# Altium PCB Input Cover Breakout.PcbDoc
Units mil, origin at the board's own origin, x right, y up, seen from the top; angles counter-clockwise.
Board outline 1640 x 1900 mil, 2 copper layers (Top Layer, Bottom Layer); 6 components, 42 nets, 105 pads, 25 vias.
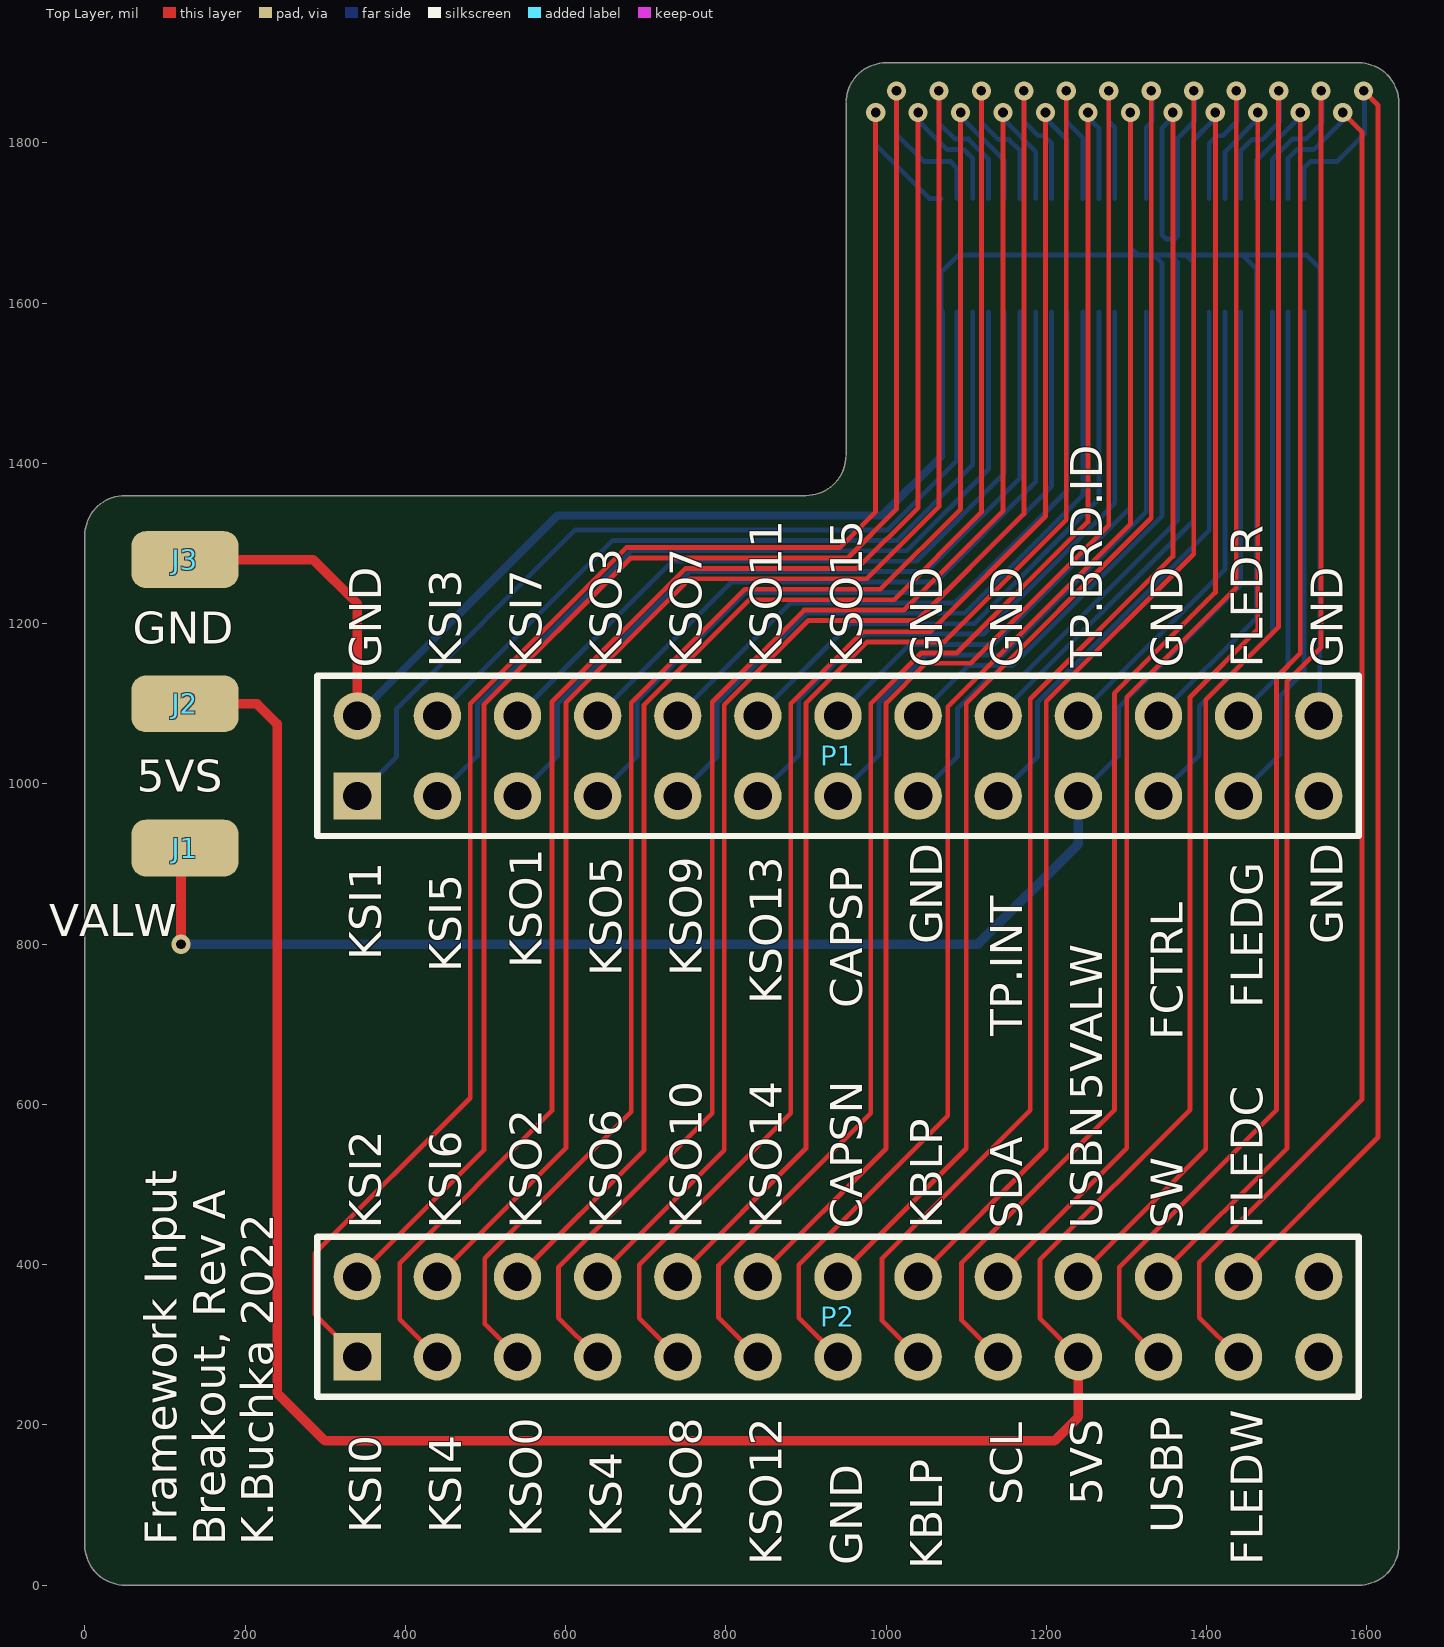
[diagram p0: Top Layer view]
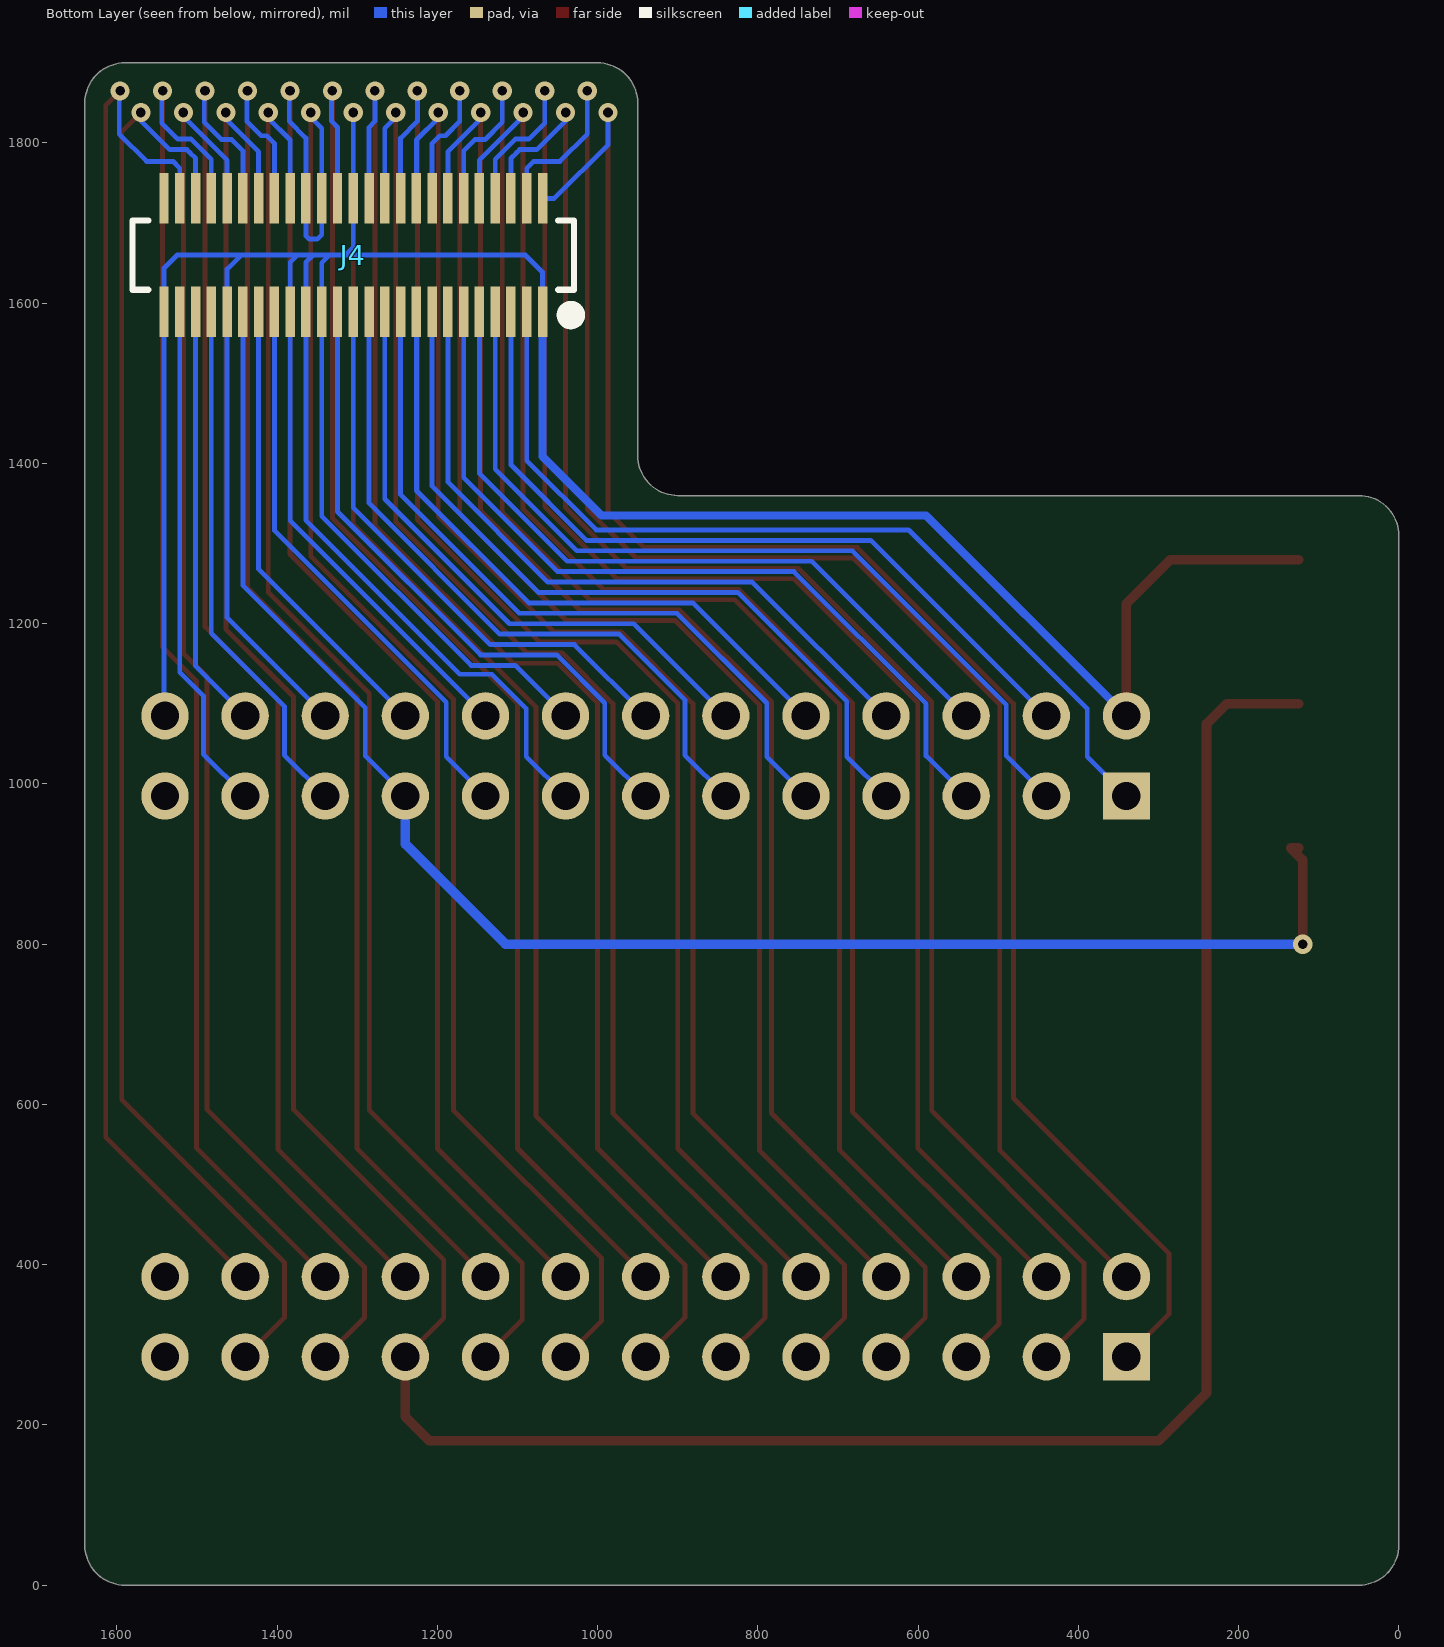
[diagram p1: Bottom Layer view, seen from below]

## Layer stack, top to bottom
Top Solder: solder mask 0.4, Solder Resist, Dk 3.5
Top Layer: signal copper 1.4
Dielectric 1: dielectric 12.6, FR-4, Dk 4.8
Bottom Layer: signal copper 1.4
Bottom Solder: solder mask 0.4, Solder Resist, Dk 3.5

## Board outline
0,50 0,1310 cw(c50,1310) 50,1360 900,1360 ccw(c900,1410) 950,1410 950,1850 cw(c1000,1850) 1000,1900 1590,1900 cw(c1590,1850) 1640,1850 1640,50 cw(c1590,50) 1590,0 50,0 cw(c50,50)

## Design rules (kind name [scope] priority, off if disabled: settings)
Clearance [All] p1: gap=7 ignorepadtopadclearanceinfootprint=FALSE
PolygonConnect [All] p1: connectstyle=Relief reliefconductorwidth=10 reliefentries=4 polygonreliefangle="90 Angle" airgapwidth=10
RoomDefinition "Input Cover Breakout" [InComponentClass('Input Cover Breakout')] p1: confinementstyle=ConfineIn formatcopy=TRUE lockcomponents=FALSE outline -1460,-1815 6820,-1815 6820,3840 -1460,3840
RoutingVias [All] p1: holewidth=12 width=24 viastyle="Through Hole" minholewidth=12 minwidth=24 maxholewidth=28 maxwidth=50
SolderMaskExpansion [All] p1: expansion=4
Width [All] p1: maxlimit=30 minlimit=6 preferedwidth=8 minimp=50.000000 maximp=50.000000 favimp=50.000000
30 further rules are at their usual default settings.

## Components (designator, comment, footprint, x,y, rotation, side; value= is the part's Value field where it differs from the comment)
J1 "RCS-0C" RCS-0C 125,920 r270 top
J2 "RCS-0C" RCS-0C 125,1100 r270 top
J3 "RCS-0C" RCS-0C 125,1280 r270 top
J4 "10156001-051100LF" 10156001-051100LF 1305,1660 r0 bottom
P1 "Header 13X2" HDR2X13 340,985 r0 top
P2 "Header 13X2" HDR2X13 340,285 r0 top

## Footprints (in the part's own frame and the unit in brackets; to place one, negate y for a bottom-side part, rotate by r counter-clockwise, add the part's x,y. Pads: shape width x height; smd on the part's side, far side on the other; paste and mask are expansions set on the pad)
10156001-051100LF [mm]
  rect 0.3x1.6 smd: 1(-6,1.8) 2(-6,-1.8) 3(-5.5,1.8) 4(-5.5,-1.8) 5(-5,1.8) 6(-5,-1.8) 7(-4.5,1.8) 8(-4.5,-1.8) 9(-4,1.8) 10(-4,-1.8) 11(-3.5,1.8) 12(-3.5,-1.8) 13(-3,1.8) 14(-3,-1.8) 15(-2.5,1.8) 16(-2.5,-1.8) 17(-2,1.8) 18(-2,-1.8) 19(-1.5,1.8) 20(-1.5,-1.8) 21(-1,1.8) 22(-1,-1.8) 23(-0.5,1.8) 24(-0.5,-1.8) 25(0,1.8) 26(0,-1.8) 27(0.5,1.8) 28(0.5,-1.8) 29(1,1.8) 30(1,-1.8) 31(1.5,1.8) 32(1.5,-1.8) 33(2,1.8) 34(2,-1.8) 35(2.5,1.8) 36(2.5,-1.8) 37(3,1.8) 38(3,-1.8) 39(3.5,1.8) 40(3.5,-1.8) 41(4,1.8) 42(4,-1.8) 43(4.5,1.8) 44(4.5,-1.8) 45(5,1.8) 46(5,-1.8) 47(5.5,1.8) 48(5.5,-1.8) 49(6,1.8) 50(6,-1.8)
  silkscreen extent -7.1,-1.1 7,2.1
HDR2X13 [mm] "Connector; Header; 13x2 Position"
  rect 1.5x1.5 hole 0.9: 1(0,0)
  round 1.5 hole 0.9: 2(0,2.54) 3(2.54,0) 4(2.54,2.54) 5(5.08,0) 6(5.08,2.54) 7(7.62,0) 8(7.62,2.54) 9(10.16,0) 10(10.16,2.54) 11(12.7,0) 12(12.7,2.54) 13(15.24,0) 14(15.24,2.54) 15(17.78,0) 16(17.78,2.54) 17(20.32,0) 18(20.32,2.54) 19(22.86,0) 20(22.86,2.54) 21(25.4,0) 22(25.4,2.54) 23(27.94,0) 24(27.94,2.54) 25(30.48,0) 26(30.48,2.54)
  silkscreen extent -1.27,-1.27 31.75,3.81
RCS-0C [mm] "1206 Test Point"
  rrect50% 1.8x3.4 smd: 1(0,0)

## Part data
P1 P2: "Header, 13-Pin, Dual row", LatestRevisionDate=17-Jul-2002, LatestRevisionNote="Re-released for DXP Platform.", Publisher="Altium Limited"

## Via types
v1: diameter 24, hole 12, Top Layer to Bottom Layer, 25 vias

## Nets (pads, with @x,y where several pads share a name; then routed paths per layer and width w, separated by ;. In a path a pad name is that pad's centre, name@x,y a point inside that pad or via, vN(x,y) a via of type N, cw(c..) or ccw(c..) an arc to the next point about the centre after c; other vN are vias at no path point)
5VALW: J1.1 J4.39 P1.19 | length 2056.1
  Top Layer w12: v1(120,800) 120,905 135,920 J1.1
  Bottom Layer w6: P1.19 1290,1035 1290,1095 1442.8,1247.8 J4.39
  Bottom Layer w12: v1(120,800) 1115,800 1240,925 P1.19
5VS: J2.1 J4.38 P2.19 | length 3872.3
  Top Layer w6: P2.19 1192,333 1192,406 1379.53,593.53 1379.53,1108.53 1464,1193 v1@1464,1836
  Top Layer w12: J2.1 215,1100 240,1075 240,240 300,180 1210,180 1240,210 P2.19
  Bottom Layer w6: J4.38 1423.11,1789.11 v1@1464,1830
  other v1: 1464,1838
CAPS_N: J4.28 P2.14 | length 1768.1
  Top Layer w6: P2.14 1100,545 1100,1100.9 1331,1331.9 v1@1331,1860
  Bottom Layer w6: J4.28 1324.68,1819.68 1332,1827 v1@1332,1859
  other v1: 1331,1865
CAPS_P: J4.27 P1.13 | length 819.1
  Bottom Layer w6: P1.13 991,1036 991,1101 1051,1161 1146,1161 1324.68,1339.68 J4.27
FPR_CTRL: J4.43 P1.21 | length 663
  Bottom Layer w6: P1.21 1391,1036 1391,1097 1482.17,1188.17 J4.43
FPR_LED_COM: J4.48 P2.24 | length 1733.3
  Top Layer w6: P2.24 1614,559 1614,1847 v1(1596,1865)
  Bottom Layer w6: J4.48 1521.54,1768.54 1530,1777 1563,1777 1597,1811 v1@1597,1854
FPR_LED_G: J4.47 P1.23 | length 637.9
  Bottom Layer w6: P1.23 1492,1037 1492,1110 1521.54,1139.54 J4.47
FPR_LED_R: J4.45 P1.24 | length 529.8
  Bottom Layer w6: P1.24 1501.85,1146.85 J4.45
FPR_LED_W: J4.46 P2.23 | length 1805.4
  Top Layer w6: P2.23 1391,334 1391,403 1594,606 1594,1814 v1(1570,1838)
  Bottom Layer w6: J4.46 1501.85,1780.85 1509,1788 1508.77,1788 1512.58,1791.81 1533.81,1791.81 v1@1570,1828
GND: J3.1 J4.1 J4.26 J4.29 J4.31 J4.33 J4.41 J4.49 P1.2 P1.15 P1.16 P1.18 P1.22 P1.26 P2.13 | length 7322.2
  Top Layer w6: P2.13 891,334 891,400 1077,586 1077,1096.29 1305,1324.29 v1@1305,1833
  Top Layer w12: J3.1 285,1280 340,1225 P1.2
  Bottom Layer w6: P1.15 1089,1034 1089,1094 1132,1137 1172,1137 1364.06,1329.06 J4.31 1364.06,1650.94 1355,1660 ; P1.16 1103,1148 1158,1148 1344.37,1334.37 J4.29 1344.37,1650.63 1335,1660 ; J4.1 1068.78,1638.78 1090,1660 1315,1660 ; P1.18 1383.74,1328.74 J4.33 1383.74,1651.26 1375,1660 ; v1@1305,1833 J4.26 1305,1670 1315,1660 ; P1.22 1462.48,1207.48 J4.41 1462.48,1642.52 1445,1660 ; P1.26 P1.26@1541.22,1086.22 ; P1.26@1541.22,1085 P1.26@1541.22,1086.22 ; 1315,1660 1335,1660 ; 1335,1660 1355,1660 ; 1355,1660 1375,1660 ; 1375,1660 1445,1660 ; 1445,1660 1525,1660 1541.22,1643.78 J4.49 P1.26@1541.22,1086.22
  Bottom Layer w10: P1.2 590,1335 995,1335 1068.78,1408.78 J4.1
  other v1: 1305,1838
KBL_P: J4.30 J4.32 P2.15 P2.16 | length 3694.8
  Top Layer w6: P2.15 995,330 995,408 1180,593 1180,1106 1358,1284 v1@1358,1834 ; P2.16 1200,545 1200,1103 1384,1287 v1@1384,1861
  Bottom Layer w6: v1@1358,1832 1344.37,1818.37 J4.30 1344.37,1685.63 1350,1680 1360,1680 1364.06,1684.06 J4.32 1364.06,1806.06 1385,1827 v1@1385,1858
  other v1: 1358,1838 1384,1865
KSI0: J4.2 P2.1 | length 2148.5
  Top Layer w6: P2.1 287,338 287,414 481,608 481,1100.29 675.71,1295 942,1295 987,1340 v1@987,1827
  Bottom Layer w6: v1@987,1827 987,1798 1054.13,1730.87 J4.2
  other v1: 987,1838
KSI1: J4.3 P1.1 | length 1142.6
  Bottom Layer w6: P1.1 389,1034 389,1094 612,1317 1002,1317 1088.46,1403.46 J4.3
KSI2: J4.4 P2.2 | length 2080.2
  Top Layer w6: P2.2 498,543 498,1098.9 681.1,1282 952,1282 1013,1343 v1@1013,1854
  Bottom Layer w6: v1@1013,1854 1013,1811 1047,1777 1080,1777 1088.46,1768.54 J4.4
  other v1: 1013,1865
KSI3: J4.5 P1.4 | length 988.8
  Bottom Layer w6: P1.4 659,1304 1014,1304 1108.15,1398.15 J4.5
KSI4: J4.6 P2.3 | length 2094.1
  Top Layer w6: P2.3 393,332 393,402 583,592 583,1102.29 749.71,1269 964,1269 1040,1345 v1@1040,1828
  Bottom Layer w6: v1@1040,1828 1076.19,1791.81 1097.42,1791.81 1101.23,1788 1101,1788 1108.15,1780.85 J4.6
  other v1: 1040,1838
KSI5: J4.7 P1.3 | length 1090.6
  Bottom Layer w6: P1.3 490,1035 490,1099 682,1291 1026,1291 1127.83,1392.83 J4.7
KSI6: J4.8 P2.4 | length 2018.2
  Top Layer w6: P2.4 600.47,545.47 600.47,1101.37 755.1,1256 976,1256 1066,1346 v1@1066,1855
  Bottom Layer w6: v1@1066,1855 1066,1824.89 1086.08,1804.81 1102.81,1804.81 1127.83,1779.78 J4.8
  other v1: 1066,1865
KSI7: J4.9 P1.6 | length 934.4
  Bottom Layer w6: P1.6 733,1278 1038,1278 1147.52,1387.52 J4.9
KSO0: J4.10 P2.5 | length 2029.3
  Top Layer w6: P2.5 499,326 499,408 682,591 682,1101.29 823.71,1243 993,1243 1093,1343 v1@1093,1829
  Bottom Layer w6: v1@1093,1829 1097,1829 1147.52,1778.48 J4.10
  other v1: 1093,1838
KSO1: J4.11 P1.5 | length 1036.7
  Bottom Layer w6: P1.5 590,1035 590,1100 755,1265 1050,1265 1167.2,1382.2 J4.11
KSO2: J4.12 P2.6 | length 1969.4
  Top Layer w6: P2.6 698,543 698,1098.9 829.1,1230 1010,1230 1119,1339 v1@1119,1856
  Bottom Layer w6: v1@1119,1856 1119,1825.89 1140.58,1804.31 1153.31,1804.31 1167.2,1790.41 J4.12
  other v1: 1119,1865
KSO3: J4.13 P1.8 | length 880
  Bottom Layer w6: P1.8 807,1252 1062,1252 1186.89,1376.89 J4.13
KSO4: J4.14 P2.7 | length 1984.1
  Top Layer w6: P2.7 591,334 591,397 783,589 783,1102.29 897.71,1217 1022,1217 1146,1341 v1@1146,1830
  Bottom Layer w6: v1@1146,1830 1186.89,1789.11 J4.14
  other v1: 1146,1838
KSO5: J4.15 P1.7 | length 984.7
  Bottom Layer w6: P1.7 689,1034 689,1103 825,1239 1074,1239 1206.57,1371.57 J4.15
KSO6: J4.16 P2.8 | length 1916.6
  Top Layer w6: P2.8 798,543 798,1098.9 903.1,1204 1039,1204 1172,1337 v1@1172,1857
  Bottom Layer w6: v1@1172,1857 1172,1826.89 1189.89,1809 1197,1809 1206.57,1799.43 J4.16
  other v1: 1172,1865
KSO7: J4.17 P1.10 | length 825.6
  Bottom Layer w6: P1.10 881,1226 1086,1226 1226.26,1366.26 J4.17
KSO8: J4.18 P2.9 | length 1936.7
  Top Layer w6: P2.9 692,333 692,400 881,589 881,1100.29 970.71,1190 1055,1190 1199,1334 v1@1199,1831
  Bottom Layer w6: v1@1199,1831 1226.26,1803.74 J4.18
  other v1: 1199,1838
KSO9: J4.19 P1.9 | length 929.1
  Bottom Layer w6: P1.9 789,1034 789,1101 901,1213 1098,1213 1245.94,1360.94 J4.19
KSO10: J4.20 P2.10 | length 1865.9
  Top Layer w6: P2.10 900,545 900,1100.9 976.1,1177 1072,1177 1225,1330 v1@1225,1858
  Bottom Layer w6: v1@1225,1858 1225,1827 1245.94,1806.06 J4.20
  other v1: 1225,1865
KSO11: J4.21 P1.12 | length 771.2
  Bottom Layer w6: P1.12 955,1200 1110,1200 1265.63,1355.63 J4.21
KSO12: J4.22 P2.11 | length 1891
  Top Layer w6: P2.11 791,334 791,399 981,589 981,1100.29 1044.24,1163.53 1088.53,1163.53 1252,1327 v1@1252,1832
  Bottom Layer w6: v1@1252,1832 1265.63,1818.37 J4.22
  other v1: 1252,1838
KSO13: J4.23 P1.11 | length 875.9
  Bottom Layer w6: P1.11 891,1036 891,1105 973,1187 1122,1187 1285.32,1350.32 J4.23
KSO14: J4.24 P2.12 | length 1819.3
  Top Layer w6: P2.12 1000,545 1000,1100.9 1049.63,1150.53 1105.53,1150.53 1278,1323 v1@1278,1859
  Bottom Layer w6: v1@1278,1859 1278,1827 1285.32,1819.68 J4.24
  other v1: 1278,1865
KSO15: J4.25 P1.14 | length 716.8
  Bottom Layer w6: P1.14 1029,1174 1134,1174 1305,1345 J4.25
SWITCH: J4.44 P2.22 | length 1722.6
  Top Layer w6: P2.22 1500.47,545.47 1500.47,1128.09 1543,1170.62 v1@1543,1864
  Bottom Layer w6: J4.44 1482.17,1779.78 1507.19,1804.81 1523.92,1804.81 1544,1824.89 v1@1544,1855
  other v1: 1543,1865
TP_BOARD_ID: J4.37 P1.20 | length 580
  Bottom Layer w6: P1.20 1423.11,1268.11 J4.37
TP_INT: J4.35 P1.17 | length 713.2
  Bottom Layer w6: P1.17 1189,1034 1189,1102 1403.43,1316.43 J4.35
TP_SCL: J4.34 P2.17 | length 1811.8
  Top Layer w6: P2.17 1094,331 1094,402 1285,593 1285,1113 1411,1239 v1@1411,1835
  Bottom Layer w6: J4.34 1383.74,1803.74 v1@1411,1831
  other v1: 1411,1838
TP_SDA: J4.36 P2.18 | length 1744.6
  Top Layer w6: P2.18 1300.47,545.47 1300.47,1108.47 1437,1245 v1@1437,1862
  Bottom Layer w6: J4.36 1403.43,1799.43 1413,1809 1420.11,1809 1438,1826.89 v1@1438,1857
  other v1: 1437,1865
USBN: J4.40 P2.20 | length 1734.1
  Top Layer w6: P2.20 1399,544 1399,1105 1490,1196 v1@1490,1863
  Bottom Layer w6: J4.40 1442.8,1790.41 1456.69,1804.31 1469.42,1804.31 1491,1825.89 v1@1491,1856
  other v1: 1490,1865
USBP: J4.42 P2.21 | length 1789
  Top Layer w6: P2.21 1291,334 1291,397 1487.47,593.47 1487.47,1133.47 1517,1163 v1@1517,1837
  Bottom Layer w6: J4.42 1462.48,1778.48 1513,1829 v1@1517,1829
  other v1: 1517,1838
pads on no net: J4.50 P1.25 P2.25 P2.26

## Silkscreen, mask and mechanical layers (free items; w line width, h text height)
Top Overlay:
  text "GND" at 60,1175 h40
  text "GND" at 370,1145 h40 r90
  text "KSI3" at 470,1145 h40 r90
  text "KSI7" at 570,1145 h40 r90
  text "KSO3" at 670,1145 h40 r90
  text "KSO7" at 770,1145 h40 r90
  text "KSO11" at 870,1145 h40 r90
  text "KSO15" at 970,1145 h40 r90
  text "GND" at 1070,1145 h40 r90
  text "GND" at 1170,1145 h40 r90
  text "TP.BRD.ID" at 1270,1145 h40 r90
  text "GND" at 1370,1145 h40 r90
  text "FLEDR" at 1470,1145 h40 r90
  text "GND" at 1570,1145 h40 r90
  text "5VS" at 65,990 h40
  text "5VALW" at -80,810 h40
  text "GND" at 1070,800 h40 r90
  text "GND" at 1570,800 h40 r90
  text "KSI1" at 370,780 h40 r90
  text "KSO1" at 570,770 h40 r90
  text "KSI5" at 470,765 h40 r90
  text "KSO5" at 670,760 h40 r90
  text "KSO9" at 770,760 h40 r90
  text "KSO13" at 870,725 h40 r90
  text "CAPSP" at 970,720 h40 r90
  text "FLEDG" at 1470,720 h40 r90
  text "TP.INT" at 1170,685 h40 r90
  text "FCTRL" at 1370,680 h40 r90
  text "5VALW" at 1270,605 h40 r90
  text "KSI2" at 370,445 h40 r90
  text "KSI6" at 470,445 h40 r90
  text "KSO2" at 570,445 h40 r90
  text "KSO6" at 670,445 h40 r90
  text "KSO10" at 770,445 h40 r90
  text "KSO14" at 870,445 h40 r90
  text "CAPSN" at 970,445 h40 r90
  text "KBLP" at 1070,445 h40 r90
  text "SDA" at 1170,445 h40 r90
  text "USBN" at 1270,445 h40 r90
  text "SW" at 1370,445 h40 r90
  text "FLEDC" at 1470,445 h40 r90
  text "SCL" at 1170,100 h40 r90
  text "5VS" at 1270,100 h40 r90
  text "KSI0" at 370,65 h40 r90
  text "KSI4" at 470,65 h40 r90
  text "USBP" at 1370,65 h40 r90
  text "KSO0" at 570,60 h40 r90
  text "KS4" at 670,60 h40 r90
  text "KSO8" at 770,60 h40 r90
  text "Framework Input / Breakout, Rev A / K.Buchka 2022" at 235,50 h40 r90
  text "KSO12" at 870,25 h40 r90
  text "GND" at 970,25 h40 r90
  text "FLEDW" at 1470,25 h40 r90
  text "KBLP" at 1070,20 h40 r90
Mechanical 1:
  the board outline again, w3.94